# Altium PCB switching_noise_board.PcbDoc
Units mil, origin at the board's own origin, x right, y up, seen from the top; angles counter-clockwise.
Board outline 3500 x 2000 mil, 2 copper layers (Top Layer, Bottom Layer), stack 61.756 mil thick; 45 components, 30 nets, 141 pads, 17 vias.
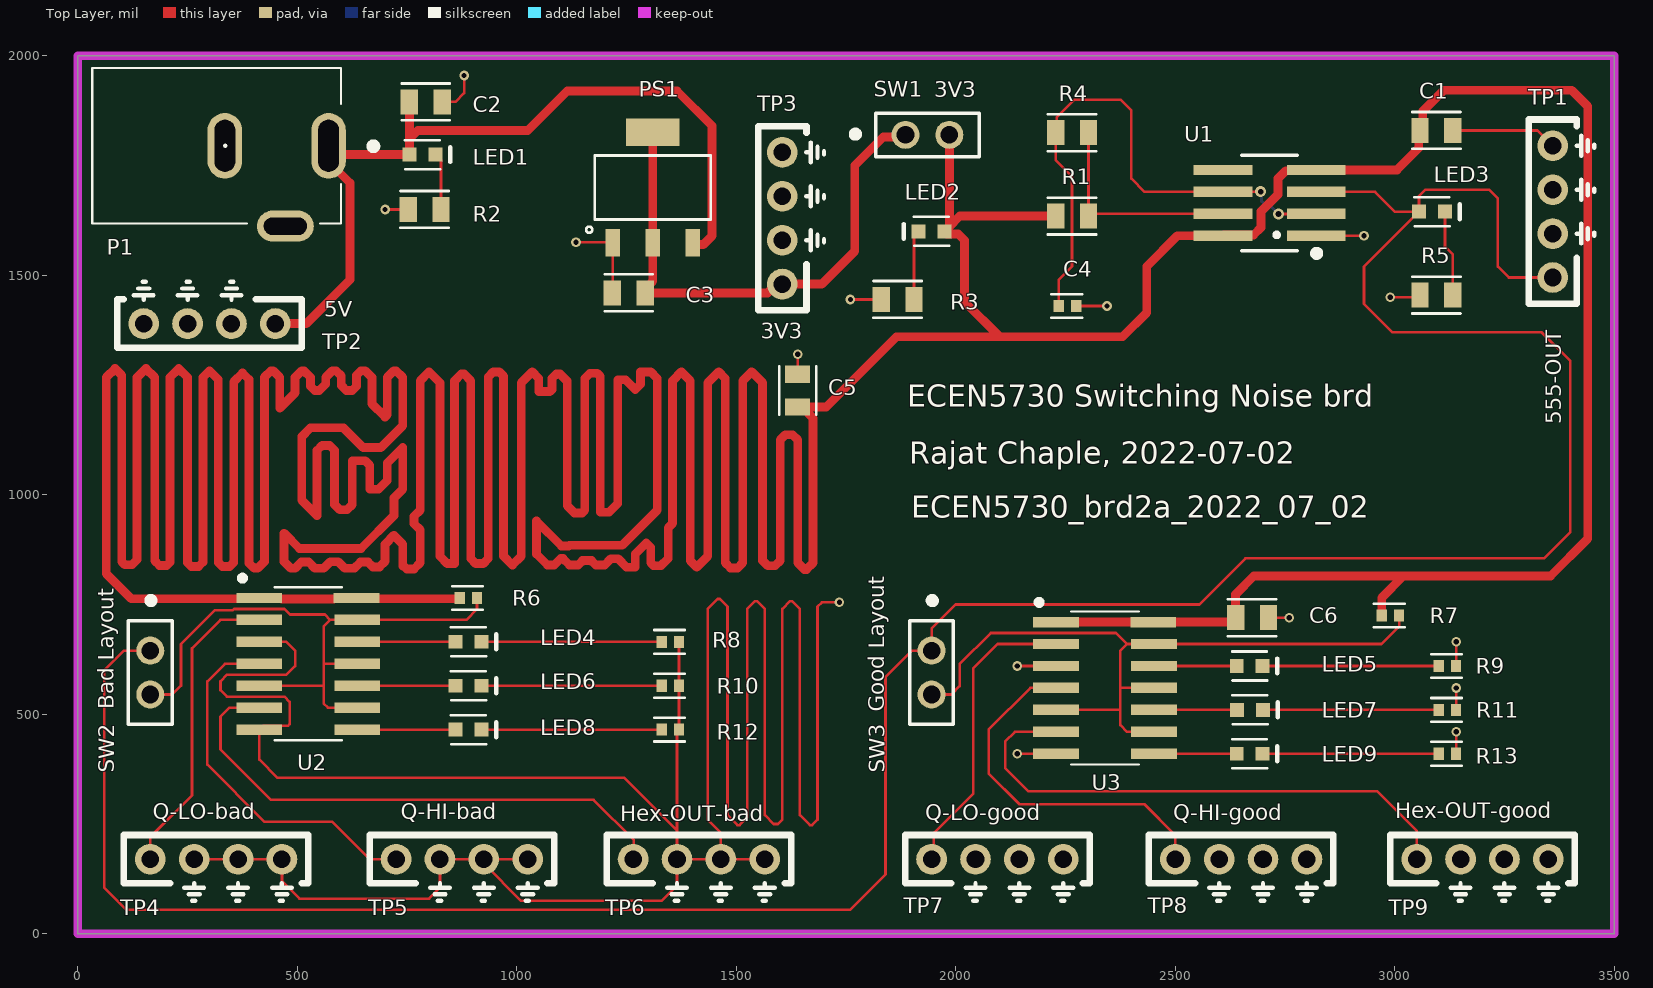
[diagram p0: Top Layer view]
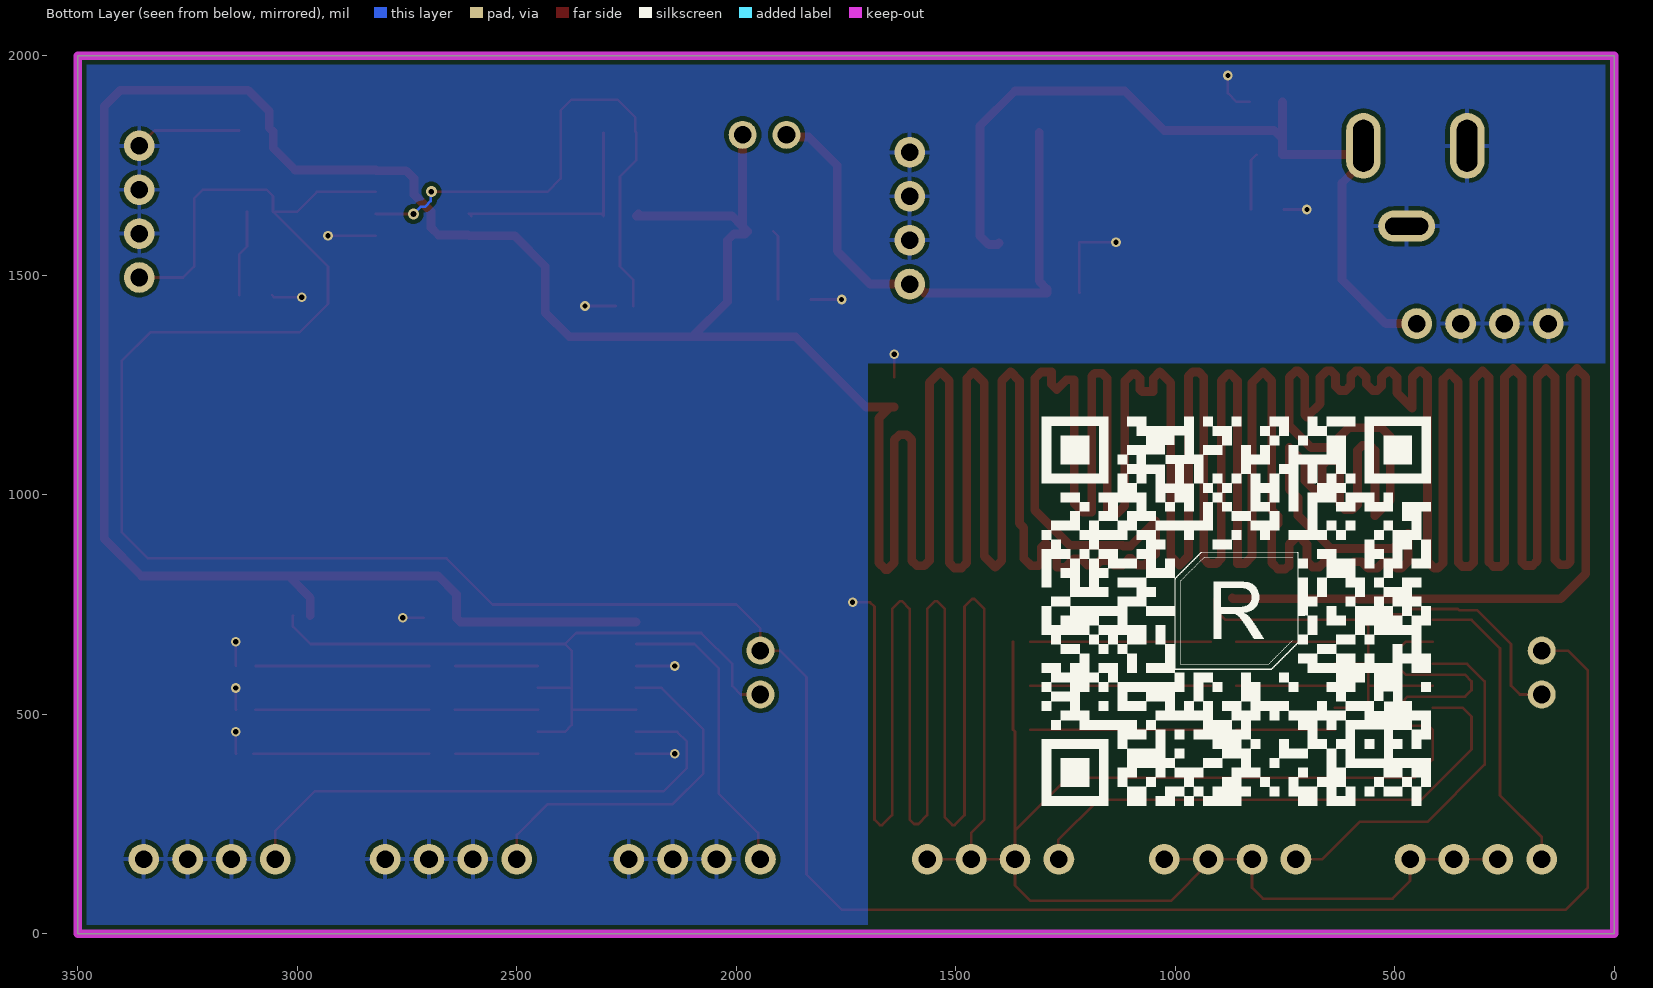
[diagram p1: Bottom Layer view, seen from below]
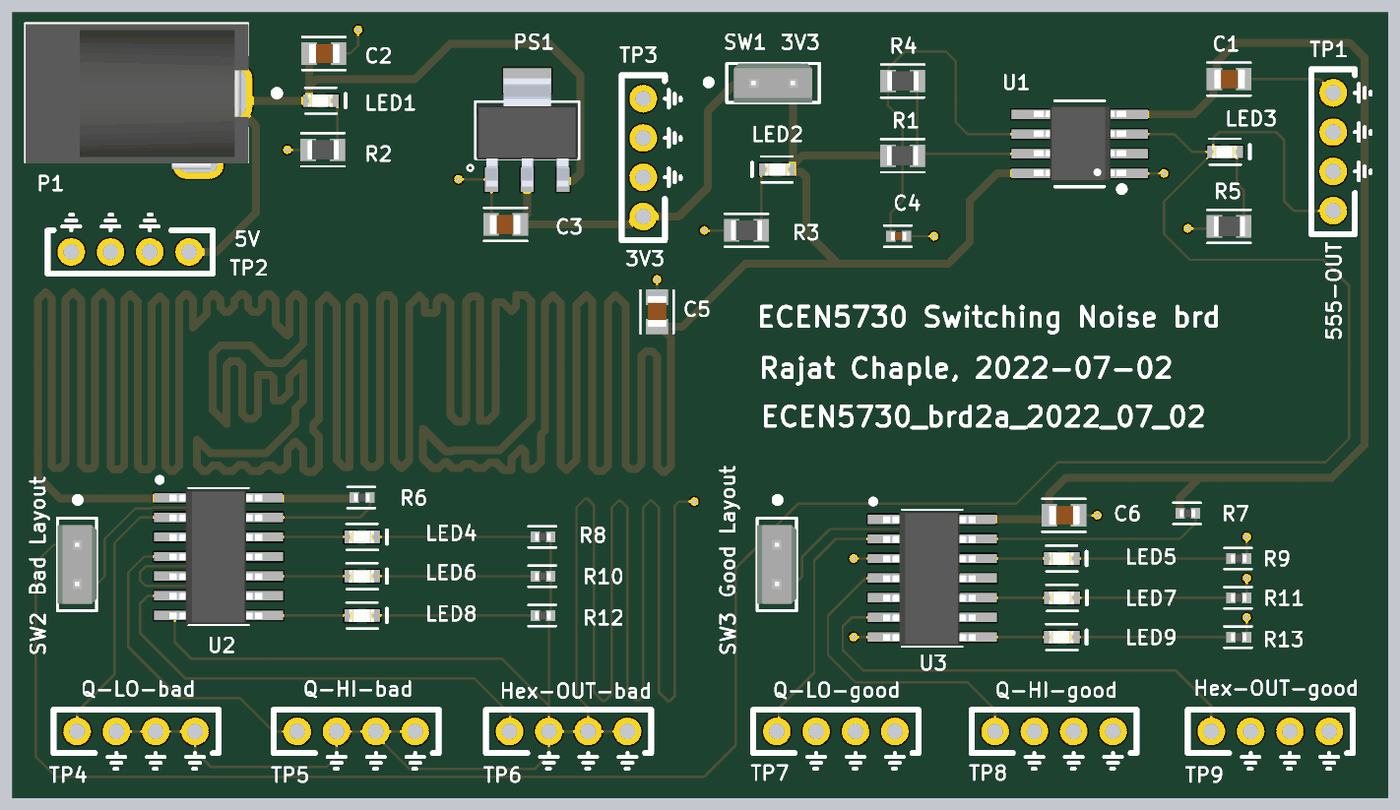
[diagram p2: 3D render of the assembled board from above, using the file's embedded part models]

## Layer stack, top to bottom
Top Solder: solder mask 1, SM-001, Dk 4
Top Layer: signal copper 1.378
Dielectric 1: core 59, Core-043, Dk 4.3
Bottom Layer: signal copper 1.378
Bottom Solder: solder mask 1, SM-001, Dk 4

## Board outline
0,0 3500,0 3500,2000 0,2000

## Design rules (kind name [scope] priority, off if disabled: settings)
BoardOutlineClearance [All] p1: gap=10 ignorepadtopadclearanceinfootprint=FALSE except(0: Arc-SplitContinuation Track-SplitContinuation SMDPad-SplitContinuation THPad-SplitContinuation Via-SplitContinuation Fill-SplitContinuation Poly-SplitContinuation Region-SplitContinuation Text-SplitContinuation)
Clearance [All] p1: gap=10 ignorepadtopadclearanceinfootprint=FALSE except(0: Arc-Hole Track-Hole SMDPad-Hole THPad-Hole Via-Hole Fill-Hole Poly-Hole Region-Hole Text-Hole)
HoleSize [All] p1: absolutevalues=TRUE maxlimit=120 minlimit=1 maxpercent=80.000 minpercent=20.000
PlaneClearance [All] p1: clearance=10
PlaneConnect [All] p1: planeconnectstyle=Direct reliefexpansion=20 reliefentries=4 reliefconductorwidth=10 reliefairgap=10
PolygonConnect [All] p1: thpad.connectstyle=Relief thpad.reliefconductorwidth=10 thpad.reliefentries=4 thpad.polygonreliefangle="90 Angle" thpad.airgapwidth=10 smdpad.connectstyle=Direct smdpad.reliefconductorwidth=10 smdpad.reliefentries=4 smdpad.polygonreliefangle="90 Angle" smdpad.airgapwidth=10 via.connectstyle=Direct via.reliefconductorwidth=10 via.reliefentries=4 via.polygonreliefangle="90 Angle" via.airgapwidth=10
RoutingVias [All] p1: holewidth=13 width=25 viastyle="Through Hole" minholewidth=13 minwidth=25 maxholewidth=60 maxwidth=80
SolderMaskExpansion [All] p1: expansion=4 istentingtop=FALSE
UnRoutedNet [All] p1: checkbadconnections=TRUE
Width "Schematic Width Constraint_1" [InNet('NetC3_2')] p1: maxlimit=100 minlimit=10 preferedwidth=20 minimp=50.000000 maximp=50.000000 favimp=50.000000
Width "Schematic Width Constraint_2" [InNet('+3v3')] p2: maxlimit=100 minlimit=10 preferedwidth=20 minimp=50.000000 maximp=50.000000 favimp=50.000000
Width "Schematic Width Constraint" [InNet('+5v')] p3: maxlimit=100 minlimit=10 preferedwidth=20 minimp=50.000000 maximp=50.000000 favimp=50.000000
Width [All] p4: maxlimit=100 minlimit=6 preferedwidth=6 minimp=50.000000 maximp=50.000000 favimp=50.000000
26 further rules are at their usual default settings.

## Components (designator, comment, footprint, x,y, rotation, side; value= is the part's Value field where it differs from the comment)
C1 "22uF" 0805_Passive_Capaciitor 3095,1830 r180 top
C2 "22uF" 0805_Passive_Capaciitor 792.6,1895 r180 top
C3 "22uF" 0805_Passive_Capaciitor 1255,1460 r0 top
C4 "1uF" 0402_Passive_Capacitor 2254.69,1430 r180 top
C5 "22uF" 0805_Passive_Capaciitor 1640,1237.5 r270 top
C6 "22uF" 0805_Passive_Capaciitor 2675,720 r180 top
LED1 "KT-0603R" LED_0603 785,1775 r0 top value=Green
LED2 "KT-0603R" LED_0603 1945,1600 r180 top value=Green
LED3 "KT-0603R" LED_0603 3085,1645 r0 top value=Red
LED4 "KT-0603R" LED_0603 890,665 r0 top value=Red
LED5 "KT-0603R" LED_0603 2669.53,610 r0 top value=Red
LED6 "KT-0603R" LED_0603 890,565 r0 top value=Red
LED7 "KT-0603R" LED_0603 2670.47,510 r0 top value=Red
LED8 "KT-0603R" LED_0603 890,465 r0 top value=Red
LED9 "KT-0603R" LED_0603 2669.53,410 r0 top value=Red
P1 "Power Jack" Power_Jack 571.22,1795 r180 top value="CONN PWR JACK 2X5.5MM SOLDER"
PS1 "AMS1117-3.3" LDO 1310,1700 r0 top value="IC REG LINEAR 3.3V 800MA SOT223"
R1 "1k" 0805_Passive_Resistor 2265,1635 r180 top value="1K Ohm"
R2 "1k" 0805_Passive_Resistor 790,1650 r0 top value="1K Ohm"
R3 "1k" 0805_Passive_Resistor 1867.6,1445 r0 top value="1K Ohm"
R4 "1k" 0805_Passive_Resistor 2265,1825 r0 top value="1K Ohm"
R5 "1k" 0805_Passive_Resistor 3095,1455 r0 top value="1K Ohm"
R6 "10k" 0402_Passive_Resistor 889.69,765 r180 top value=10KOhm
R7 "10k" 0402_Passive_Resistor 2990,725 r180 top value=10KOhm
R8 "47 Ohms" 0402_Passive_Resistor 1350,665 r180 top value=47Ohm
R9 "47 Ohms" 0402_Passive_Resistor 3120,610 r180 top value=47Ohm
R10 "47 Ohms" 0402_Passive_Resistor 1350,565 r180 top value=47Ohm
R11 "47 Ohms" 0402_Passive_Resistor 3120,510 r180 top value=47Ohm
R12 "47 Ohms" 0402_Passive_Resistor 1350,465 r180 top value=47Ohm
R13 "47 Ohms" 0402_Passive_Resistor 3120,410 r180 top value=47Ohm
SW1 "SW_555off/on" 2Pin-Header-Conn 1885.47,1820 r0 top
SW2 "SW_555_Bad_layout" 2Pin-Header-Conn 165,645 r270 top
SW3 "SW_555_Good_layout" 2Pin-Header-Conn 1945,645 r270 top
TP1 "TP_555_Output" TP10x_Probe 3360,1645 r90 top
TP2 "TP_5V" TP10x_Probe 300,1390 r180 top
TP3 "TP_3v3" TP10x_Probe 1605,1630 r90 top
TP4 "Q-LO-bad" TP10x_Probe 315,170 r0 top
TP5 "Q-HI-bad" TP10x_Probe 875,170 r0 top
TP6 "Hex_OUT_bad" TP10x_Probe 1415,170 r0 top
TP7 "Q-LO-good" TP10x_Probe 2095,170 r0 top
TP8 "Q-HI-good" TP10x_Probe 2650,170 r0 top
TP9 "Hex_OUT_good" TP10x_Probe 3200,170 r0 top
U1 "LMC555CMX/NOPB" TS555IDTTR 2715,1665 r180 top
U2 "74HC14D,653" HEX_74AC14 525,615 r0 top
U3 "74HC14D,653" HEX_74AC14 2340,560 r0 top

## Footprints (in the part's own frame and the unit in brackets; to place one, negate y for a bottom-side part, rotate by r counter-clockwise, add the part's x,y. Pads: shape width x height; smd on the part's side, far side on the other; paste and mask are expansions set on the pad)
2Pin-Header-Conn [mm]
  round 1.62 hole 1.02: 1(0,0) 2(2.54,0)
  silkscreen extent -3.02,-1.27 4.26,1.26, body extent -1.27,-1.27 3.81,1.27, height 8.13
0402_Passive_Capacitor [mm] "Reference: https://www.worthingtonassembly.com/perfect-0402-footprint"
  rect 0.6x0.7 smd mask+0: 1(-0.5,0) 2(0.5,0)
  silkscreen extent -0.84,-0.69 0.94,0.69, body extent -0.5,-0.27 0.5,0.28, height 0.5
0402_Passive_Resistor [mm] "Reference: https://www.worthingtonassembly.com/perfect-0402-footprint"
  rect 0.6x0.7 smd mask+0: 1(-0.5,0) 2(0.5,0)
  silkscreen extent -0.84,-0.69 0.94,0.69, body extent -0.49,-0.25 0.51,0.25, height 0.4
0805_Passive_Capaciitor [mm] "Reference: http://livepartlibrary.com/fpdimensions.html"
  rect 1x1.45 smd mask+0: 1(-0.95,0) 2(0.95,0)
  silkscreen extent -1.4,-1.07 1.4,1.07, body extent -1.04,-0.62 0.96,0.63, height 1.4
0805_Passive_Resistor [mm] "Reference: http://livepartlibrary.com/fpdimensions.html"
  rect 1x1.45 smd mask+0: 1(-0.95,0) 2(0.95,0)
  silkscreen extent -1.4,-1.07 1.4,1.07, body extent -0.98,-0.62 1.02,0.63, height 0.5
HEX_74AC14 [mm]
  rect 2.65x0.6 smd: 1(-2.836,3.81) 2(-2.836,2.54) 3(-2.836,1.27) 4(-2.836,0) 5(-2.836,-1.27) 6(-2.836,-2.54) 7(-2.836,-3.81) 8(2.836,-3.81) 9(2.836,-2.54) 10(2.836,-1.27) 11(2.836,0) 12(2.836,1.27) 13(2.836,2.54) 14(2.794,3.81)
  silkscreen extent -3.94,-4.43 1.95,5.08, body extent -3.18,-4.35 2.82,4.3, height 1.75
LDO [mil]
  rect 33x63 smd: 1(-91,-126) 2(0,-126) 3(91,-126)
  rect 122x63 smd: 4(0,126)
  silkscreen extent -152,-103 132,73, body extent -128,-144 128,132, height 73
LED_0603 [mm]
  rect 0.8x0.8 smd: 1(-0.75,0) 2(0.75,0)
  silkscreen extent -1.02,-0.84 1.6,0.84, body extent -0.84,-0.41 0.76,0.39, height 0.55
Power_Jack [mm]
  oval 2x3.8 hole 1.2 slot 3 at 90 deg: 1(0,0) 2(6,0)
  oval 3.3x1.8 hole 1 slot 2.5 at 0 deg: 3(2.5,4.65)
  silkscreen extent -2.79,-4.5 13.68,4.5, body extent -0.76,-4.45 13.64,4.95, height 11.49
TP10x_Probe [mil] "Small Probs footprint"
  round 70 hole 40: 1(-150,0) 2(-50,0) 2(50,0) 2(150,0)
  silkscreen extent -210,-95 210,55
TS555IDTTR [mm] "IC OSC Single Timer 2.7MHz 8SOIC"
  rect 3.4x0.6 smd: 1(-2.7,1.905) 2(-2.7,0.635) 3(-2.7,-0.635) 4(-2.7,-1.905) 5(2.7,-1.905) 6(2.7,-0.635) 7(2.7,0.635) 8(2.7,1.905)
  silkscreen extent -2.85,-2.77 1.6,3.05, body extent -3.03,-2.48 2.96,2.43, height 1.75

## Part data
C1 C2 C3 C5 C6: library part C_22uF_0805, "MULTILAYER CERAMIC CAPACITORS MLCC - SMD/SMT 22UF 25V 0805 ROHS", LCSC Part#=C45783, MFR Part #=CL21A226MAQNNNE, Datasheet=https://datasheet.lcsc.com/szlcsc/Samsung-Electro-Mechanics-CL21A226MAQNNNE_C45783.pdf, Type=Basic
C4: library part C_1uF_0402, "MULTILAYER CERAMIC CAPACITORS MLCC - SMD/SMT 1UF 25V 0402 ROHS", LCSC Part#=C52923, MFR Part #=CL05A105KA5NQNC, Datasheet=https://datasheet.lcsc.com/szlcsc/Samsung-Electro-Mechanics-CL05A105KA5NQNC_C52923.pdf, Type=Basic
LED1 LED2: library part LED_GREEN_0603, "LIGHT EMITTING DIODES (LED) GREEN 520~535NM 112~258MCD@20MA TOP VIEW 0603 ROHS", LCSC Part#=C72043, MFR Part #=19-217/GHC-YR1S2/3T, Type=Basic
LED3 LED4 LED5 LED6 LED7 LED8 LED9: library part LED_RED_0603, "LIGHT EMITTING DIODES (LED) RED 520~625NM 90~100MCD@20MA TOP VIEW 0603 ROHS", LCSC Part#=C2286, Datasheet=https://datasheet.lcsc.com/szlcsc/Everlight-Elec-19-217-BHC-ZL1M2RY-3T_C72041.pdf, MFR Part #=KT-0603R, Type=Basic
P1: library part "P_Power Jack", "Power Barrel Connector Jack 2.10mm ID (0.083\"), 5.50mm OD (0.217\") Through Hole, Right Angle", LCSC Part#=C136744, Digikey Link=https://www.digikey.com/product-detail/en/PJ-102A/CP-102A-ND/275425/?itemSeq=304982367, Digikey Part=CP-102A-ND, Type=Extended
PS1: library part PS_AMS_LDO_3v3, "LOW DROPOUT REGULATORS(LDO) POSITIVE FIXED 1.3V @ 800MA 15V 3.3V 1A SOT-223 ROHS", LCSC Part#=C6186, MFR Part #=AMS1117-3.3, Type=Basic
R1 R2 R3 R4 R5: library part R_1K_0805, "CHIP RESISTOR - SURFACE MOUNT 1KOHMS ±1% 1/8W 0805 ROHS", LCSC Part#=C17513, MFR Part #=0805W8F1001T5E, Type=Basic
R6 R7: library part R_10KOhm_0402, "CHIP RESISTOR - SURFACE MOUNT 10KOHMS ±1% 1/16W 0402 ROHS", LCSC Part#=C25744, MFR Part #=0402WGF1002TCE, Datasheet=https://datasheet.lcsc.com/szlcsc/Uniroyal-Elec-0402WGF1002TCE_C25744.pdf, Type=Basic
R8 R9 R10 R11 R12 R13: library part R_47Ohm_0402, "CHIP RESISTOR - SURFACE MOUNT 47OHMS ±1% 1/16W 0402 ROHS", LCSC Part#=C25118, MFR Part #=0402WGF470JTCE, Datasheet=https://datasheet.lcsc.com/szlcsc/Uniroyal-Elec-0402WGF470JTCE_C25118.pdf, Type=Basic
SW1 SW2 SW3: library part SW_2Pin_100mil_Switch, "2Pin Header", LCSC Part#=C124375, Type=Extended
TP1 TP2 TP3 TP4 TP5 TP6 TP7 TP8 TP9: library part TP_10x_Probe, "Test Point 300 mil centers"
U1: library part U_555_Fast, "555 Type, Timer/Oscillator _Single_ IC 3MHz 8-SO", LCSC Part#=C90760, Package=SOIC-8, DigiKey-Purchase-URL=https://www.digikey.com/product-detail/en/texas-instruments/LMC555CMX-NOPB/LMC555CMX-NOPBCT-ND/1010550, MFR Part #=LMC555CMX/NOPB, Type=Extended
U2 U3: library part U_7414_HC_Hex, "Inverter IC 6 Channel Schmitt Trigger 14-SOIC", LCSC Part#=C5605, Datasheet=https://datasheet.lcsc.com/szlcsc/ON-Semicon-ON-74AC14SCX_C5482.pdf, MFR Part #=74HC14D,653, Type=Basic

## Via types
v1: diameter 22, hole 12, Top Layer to Bottom Layer, 15 vias
v2: diameter 25, hole 13, Top Layer to Bottom Layer, 2 vias

## Nets (pads, with @x,y where several pads share a name; then routed paths per layer and width w, separated by ;. In a path a pad name is that pad's centre, name@x,y a point inside that pad or via, vN(x,y) a via of type N, cw(c..) or ccw(c..) an arc to the next point about the centre after c; other vN are vias at no path point)
555_Bad_Layout: R6.1 SW2.2 U2.5 U2.9 U2.11 U2.13 | length 1427
  Top Layer w6: SW2.2 215,545 235,565 235,660 312,737 352.99,737 355.8,739.81 470.9,739.81 483.3,727.41 562.59,727.41 575,715 ; U2.5 560,565 ; U2.9 570,515 560,525 560,565 ; U2.11 560,615 ; R6.1 909.37,739.37 885,715 U2.13 575,715 ; 560,565 560,615 ; 560,615 560,700 575,715
555_Good_Layout: R7.1 SW3.2 U3.5 U3.9 U3.11 U3.13 | length 1701.7
  Top Layer w6: SW3.2 1990,545 2009,564 2009,614 2080,685 2365,685 2390,660 ; U3.5 2375,510 ; U3.9 2390,460 2375,475 2375,510 ; U3.11 2375,560 ; R7.1 3010,724.68 3010,700 2970,660 U3.13 2390,660 ; 2375,510 2375,560 ; 2375,560 2375,645 2390,660
555_Output: LED3.1 SW2.1 SW3.1 TP1.1 U1.3 | length 6576.8
  Top Layer w6: SW2.1 105,645 60,600 60,105 110,55 1760,55 1840,135 1840,585 1900,645 SW3.1 1945,695 2000,750 2555,750 2660,855 3340,855 3400,915 3400,1305 3335,1370 2995,1370 2930,1435 2930,1519.53 LED3.1 ; U1.3 2955,1690 3000,1645 LED3.1 ; TP1.1 3260,1495 3235,1520 3235,1675 3215,1695 3070,1695 3055.47,1680.47 LED3.1
+3v3: C1.2 C5.2 C6.2 LED2.1 R1.2 R6.2 R7.2 SW1.2 U1.4 U1.8 U2.1 U2.14 U3.1 U3.14 | length 24208.3
  Top Layer w20: R6.2 868.19,763.19 583.35,763.19 582.98,762.81 465.37,762.81 464.99,763.19 121.81,763.19 65,820 65,1267.5 85,1287.5 100,1272.5 100,847.5 106.72,840.78 123.28,840.78 135,852.5 135,1267.5 155,1287.5 175,1267.5 175,850 185.99,839.01 202.56,839.01 210,846.45 210,1267.5 230,1287.5 250,1267.5 250,845 258.36,836.64 274.93,836.64 285,846.72 285,1267.5 300,1282.5 320,1262.5 320,845.93 329.22,836.72 345.78,836.72 355,845.93 355,1257.5 375,1277.5 390,1262.5 390,844.22 401.72,832.5 410,832.5 425,847.5 425,1267.5 440,1282.5 445,1282.5 460,1267.5 460,1197.5 495,1232.5 495,1267.5 510,1282.5 515,1282.5 530,1267.5 530,1247.5 540,1237.5 550,1237.5 565,1252.5 565,1267.5 580,1282.5 588.28,1282.5 600,1270.78 600,1249.22 611.72,1237.5 625,1237.5 635,1247.5 635,1272.5 645,1282.5 655,1282.5 670,1267.5 670,1207.5 700,1177.5 705,1182.5 705,1267.5 720,1282.5 725,1282.5 740,1267.5 740,1157.5 690,1107.5 650,1107.5 605,1152.5 530,1152.5 510,1132.5 510,987.5 545,952.5 545,1100.78 556.72,1112.5 573.28,1112.5 585,1100.78 585,977.5 596.72,965.78 613.28,965.78 625,977.5 625,1077.5 655,1077.5 665,1067.5 665,1012.5 685,1012.5 705,1032.5 705,1072.5 740,1107.5 740,1012.5 720,992.5 720,952.5 645,877.5 505,877.5 470,912.5 470,847.5 485,832.5 495,832.5 509.22,846.72 525.78,846.72 540,832.5 560,832.5 575,847.5 593.28,847.5 608.28,832.5 630,832.5 644.22,846.72 660.78,846.72 671.72,835.78 687.18,835.78 700,848.61 700,887.5 720,907.5 740,887.5 740,837.5 742.5,837.5 749.22,830.78 765.78,830.78 780,845 780,920 765.78,934.22 765.78,950.78 780,965 780,1260 800,1280 825,1255 825,860 841.72,843.28 858.28,843.28 858.28,1260 873.28,1275 880,1275 895,1260 895,855 906.72,843.28 923.28,843.28 935,855 935,1268.28 946.72,1280 960,1280 970,1270 970,860 990,840 1010,860 1010,1255 1035,1280 1050,1265 1050,1235 1075,1235 1080,1240 1080,1265 1089.9,1274.9 1099,1274.9 1115,1258.91 1115,975 1131.72,958.28 1148.28,958.28 1155,965 1155,1265.06 1166.72,1276.78 1183.28,1276.78 1190,1270.06 1190,960 1210,960 1230,980 1230,1262.19 1247.81,1262.19 1270,1240 1281.72,1251.72 1281.72,1280 1305,1280 1320,1265 1320,965 1240,885 1120,885 1118.28,883.28 1101.72,883.28 1045,940 1045,865 1070,840 1085,840 1100,855 1105,855 1120,840 1140,840 1150,850 1170,850 1180,840 1200,840 1214.22,854.22 1230.78,854.22 1250,835 1270,835 1270,865 1295,890 1305,880 1305,845 1311.72,838.28 1328.28,838.28 1345,855 1345,925 1355,935 1355,1260 1375,1280 1395,1260 1395,850 1410,835 1435,860 1435,1255 1460,1280 1475,1265 1475,845 1486.72,833.28 1503.28,833.28 1515,845 1515,1260 1535,1280 1560,1255 1560,850 1571.72,838.28 1588.28,838.28 1600,850 1600,1125 1611.72,1136.72 1628.28,1136.72 1640,1125 1640,845 1655,830 1660,830 1675,845 1675,1173.96 C5.2@1648.86,1200.1 ; C5.2 C5.2@1648.86,1200.1 ; LED2.1 LED2.1@1980.28,1605.75 ; SW1.2 LED2.1@1985.47,1610.95 ; R1.2@2222.6,1640 R1.2 2009.53,1635 LED2.1@1985.47,1610.95 ; U3.1 U3.14 2627.91,710 2637.6,719.69 C6.2 2637.6,773.56 2679.04,815 3019.04,815 ; U1.8 2505,1590 2435,1520 2435,1415 2380,1360 2100,1360 ; U1.8@2610.51,1591.81 2678.28,1591.81 2695.63,1609.16 2695.63,1645.63 2734.37,1684.37 2734.37,1720.84 2751.72,1738.19 2819.49,1738.19 U1.4 3005,1740 3055,1790 3055,1827.4 C1.2 3064.13,1836.53 3064.13,1874.13 3111.72,1921.72 3403.28,1921.72 3440,1885 3440,900 3355,815 3019.04,815 ; R7.2 2970.31,765.65 3019.04,814.37 3019.04,815 ; C5.2@1648.86,1200.1 1705.1,1200.1 1865,1360 2100,1360 ; LED2.1@1980.28,1605.75 1980.28,1594.25 2005.75,1594.25 2020,1580 2020,1440 2100,1360 ; LED2.1@1980.28,1605.75 LED2.1@1985.47,1610.95
+5v: C2.2 LED1.1 P1.1 PS1.3 TP2.1 | length 1956.7
  Top Layer w20: TP2.1 520,1390 620,1490 620,1710.24 571.22,1759.02 P1.1 591.22,1775 LED1.1 ; C2.2 755.33,1894.86 755.33,1775.14 LED1.1 ; PS1.3 1405,1570 1425,1570 1445,1590 1445,1840 1365,1920 1115,1920 1025,1830 775,1830 755.47,1810.47 LED1.1
GND: C1.1 C2.1 C3.1 C4.1 C5.1 C6.1 P1.2 P1.3 PS1.1 R2.1 R3.1 R5.1 R8.1 R9.1 R10.1 R11.1 R12.1 R13.1 TP1.2 TP2.2 TP3.2 TP4.2 TP5.2 TP6.2 TP7.2 TP8.2 TP9.2 U1.1 U2.3 U2.7 U3.3 U3.7 | length 9032.4
  Top Layer w6: TP4.2@265,170 365,170 465,170 465,120 505,80 800,80 825,105 825,170 925,170 TP5.2@1025,170 ; U2.3 475,665 495,645 495,610 475.19,590.19 340.19,590.19 325,575 325,555 339.81,540.19 470.52,540.19 482.51,528.19 482.51,477.51 478.81,473.81 422.16,473.81 U2.7 413.35,396.65 455,355 1245,355 1365,235 ; v1(700,1650) R2.1 ; C2.1 860,1895 880,1915 v1(880,1955) ; TP5.2@925,160 1010,75 1330,75 1365,110 TP6.2@1365,170 ; v1(1135,1575) 1218,1575 PS1.1 1219,1461.4 C3.1 ; R8.1 R10.1 R12.1 1365,460.32 1365,235 ; TP6.2@1565,170 TP6.2@1465,170 ; C5.1@1640,1267.4 v1(1640,1320) ; v1(1735,755) 1695,755 1685,745 1685,260 1672.49,247.49 1667.51,247.49 1645,270 1645,740 1627.49,757.51 1622.51,757.51 1605,740 1605,260 1595,250 1585,250 1565,270 1565,740 1547.49,757.51 1542.51,757.51 1525,740 1525,265 1507.49,247.49 1502.51,247.49 1480,270 1480,745 1462.49,762.51 1457.51,762.51 1435,740 1435,260 1465,230 TP6.2@1465,170 ; v1(1760,1445) R3.1 ; v1(2140,410) U3.7 ; v1(2140,610) U3.3 ; C4.1 v1(2344.69,1430) ; C6.1 v1(2760,720) ; U1.1 v1(2930,1590) ; v1(2990,1450) 3052.6,1450 R5.1 ; C1.1 3325,1830 TP1.2@3360,1795 ; R13.1 3140,410.32 v1(3140,460) ; R11.1 3140,510.32 v1(3140,560) ; R9.1 3140,610.32 v1(3140,665) ; TP6.2@1365,170 TP6.2@1465,170 ; TP6.2@1365,170 1365,235
NetC3_2: C3.2 PS1.2 PS1.4 SW1.1 TP3.1 | length 1229.7
  Top Layer w20: PS1.4 PS1.2 1310,1486.46 1292.4,1468.86 C3.2 1571.47,1460 1591.47,1480 TP3.1 1695,1480 1770,1555 1770,1750 1835,1815 1880.47,1815 SW1.1
NetC4_2: C4.2 R4.1 U1.2 U1.6 | length 1277.3
  Top Layer w6: C4.2 2235,1490 2265,1520 2265,1725 2227.49,1762.51 2227.49,1767.49 2227.6,1767.6 R4.1 2230.02,1827.42 2230.02,1859.03 2270.99,1900 2375,1900 2400,1875 2400,1720 2430,1690 2663.82,1690 2664.3,1690.48 v2(2694.52,1690.48) ; v2(2735.48,1639.52) 2820.82,1639.52 U1.2
  Bottom Layer w6: v2(2694.52,1690.48) 2696.02,1688.98 2696.02,1668.98 2708.42,1656.58 2718.42,1656.58 v2(2735.48,1639.52)
NetLED1_2: LED1.2 R2.2 | length 130.3
  Top Layer w6: LED1.2 827.28,1762.25 827.28,1718.96 827.4,1718.83 R2.2
NetLED2_2: LED2.2 R3.2 | length 159.3
  Top Layer w6: R3.2 1905,1589.53 LED2.2
NetLED3_2: LED3.2 R5.2 | length 197.4
  Top Layer w6: LED3.2 3114.53,1565.47 3132.4,1547.6 R5.2
NetLED4_1: LED4.1 U2.12 | length 223.8
  Top Layer w6: U2.12 LED4.1
NetLED4_2: LED4.2 R8.2 | length 410.8
  Top Layer w6: LED4.2 R8.2
NetLED5_1: LED5.1 U3.12 | length 188.3
  Top Layer w6: U3.12 LED5.1
NetLED5_2: LED5.2 R9.2 | length 396.3
  Top Layer w6: LED5.2 R9.2@3095.31,610
NetLED6_1: LED6.1 U2.10 | length 223.8
  Top Layer w6: U2.10 LED6.1
NetLED6_2: LED6.2 R10.2 | length 410.8
  Top Layer w6: LED6.2 R10.2
NetLED7_1: LED7.1 U3.10 | length 189.3
  Top Layer w6: U3.10 LED7.1
NetLED7_2: LED7.2 R11.2 | length 395.3
  Top Layer w6: LED7.2 R11.2@3095.31,510
NetLED8_1: LED8.1 U2.8 | length 223.8
  Top Layer w6: U2.8 LED8.1
NetLED8_2: LED8.2 R12.2 | length 410.8
  Top Layer w6: LED8.2 R12.2
NetLED9_1: LED9.1 U3.8 | length 188.3
  Top Layer w6: U3.8 LED9.1
NetLED9_2: LED9.2 R13.2 | length 401.3
  Top Layer w6: LED9.2 R13.2
NetR1_1: R1.1 R4.2 U1.7 | length 505.4
  Top Layer w6: R4.2 R1.1 2307.4,1640 U1.7 U1.7@2603.7,1635
NetTP4_1: TP4.1 U2.2 | length 699.6
  Top Layer w6: TP4.1 165,220 260,315 260,650 325,715 U2.2
NetTP5_1: TP5.1 U2.4 | length 844
  Top Layer w6: U2.4 335,615 295,575 295,385 425,255 580,255 665,170 TP5.1
NetTP6_1: TP6.1 U2.6 | length 1240.6
  Top Layer w6: U2.6 345,515 325,495 325,420 440,305 1175,305 1266.61,213.39 TP6.1@1266.61,171.61
NetTP7_1: TP7.1 U3.2 | length 685.5
  Top Layer w6: TP7.1 1950,175 1950,230 2040,320 2040,605 2095,660 U3.2
NetTP8_1: TP8.1 U3.4 | length 830.7
  Top Layer w6: U3.4 2170,560 2075,465 2075,365 2145,295 2430,295 2500,225 TP8.1
NetTP9_1: TP9.1 U3.6 | length 1246.7
  Top Layer w6: U3.6 2135,460 2112.49,437.49 2112.49,377.51 2165,325 2960,325 3050,235 TP9.1
pads on no net: U1.5

## Polygon pours and split planes (outlines as drawn)
GND on Bottom Layer "GND_L02_P000" (solid, pour order 0): 0,2000 3500,2000 3500,0 1700,0 1700,1300 0,1300

## Keep-outs
Keep-Out Layer:
  lines w20: 0,0 0,2000 ; 0,0 3500,0 ; 0,0 0,2000 ; 0,0 3500,0 ; 0,2000 3500,2000 ; 0,2000 3500,2000 ; 3500,0 3500,2000 ; 3500,0 3500,2000

## Silkscreen, mask and mechanical layers (free items; w line width, h text height)
Top Overlay:
  text "3V3" at 1951,1906 h36
  text "5V" at 561,1406 h36
  text "3V3" at 1556,1356 h36
  text "ECEN5730 Switching Noise brd" at 1889,1200.66 h50
  text "555-OUT" at 3379,1161 h36 r90
  text "Rajat Chaple, 2022-07-02" at 1894,1070.66 h50
  text "ECEN5730_brd2a_2022_07_02" at 1899,947.33 h50
  text "Bad Layout" at 82,511 h36 r90
  text "Good Layout" at 1837,506 h36 r90
  text "Hex-OUT-good" at 3001,263 h36
  text "Q-LO-bad" at 171,261 h36
  text "Q-HI-bad" at 736,261 h36
  text "Q-LO-good" at 1931,258 h36
  text "Q-HI-good" at 2496,258 h36
  text "Hex-OUT-bad" at 1236,256 h36
Bottom Overlay:
  drawing of 115 lines, arcs and shapes, not listed